# EAGLE board Board_Mod (EAGLE 5.11)
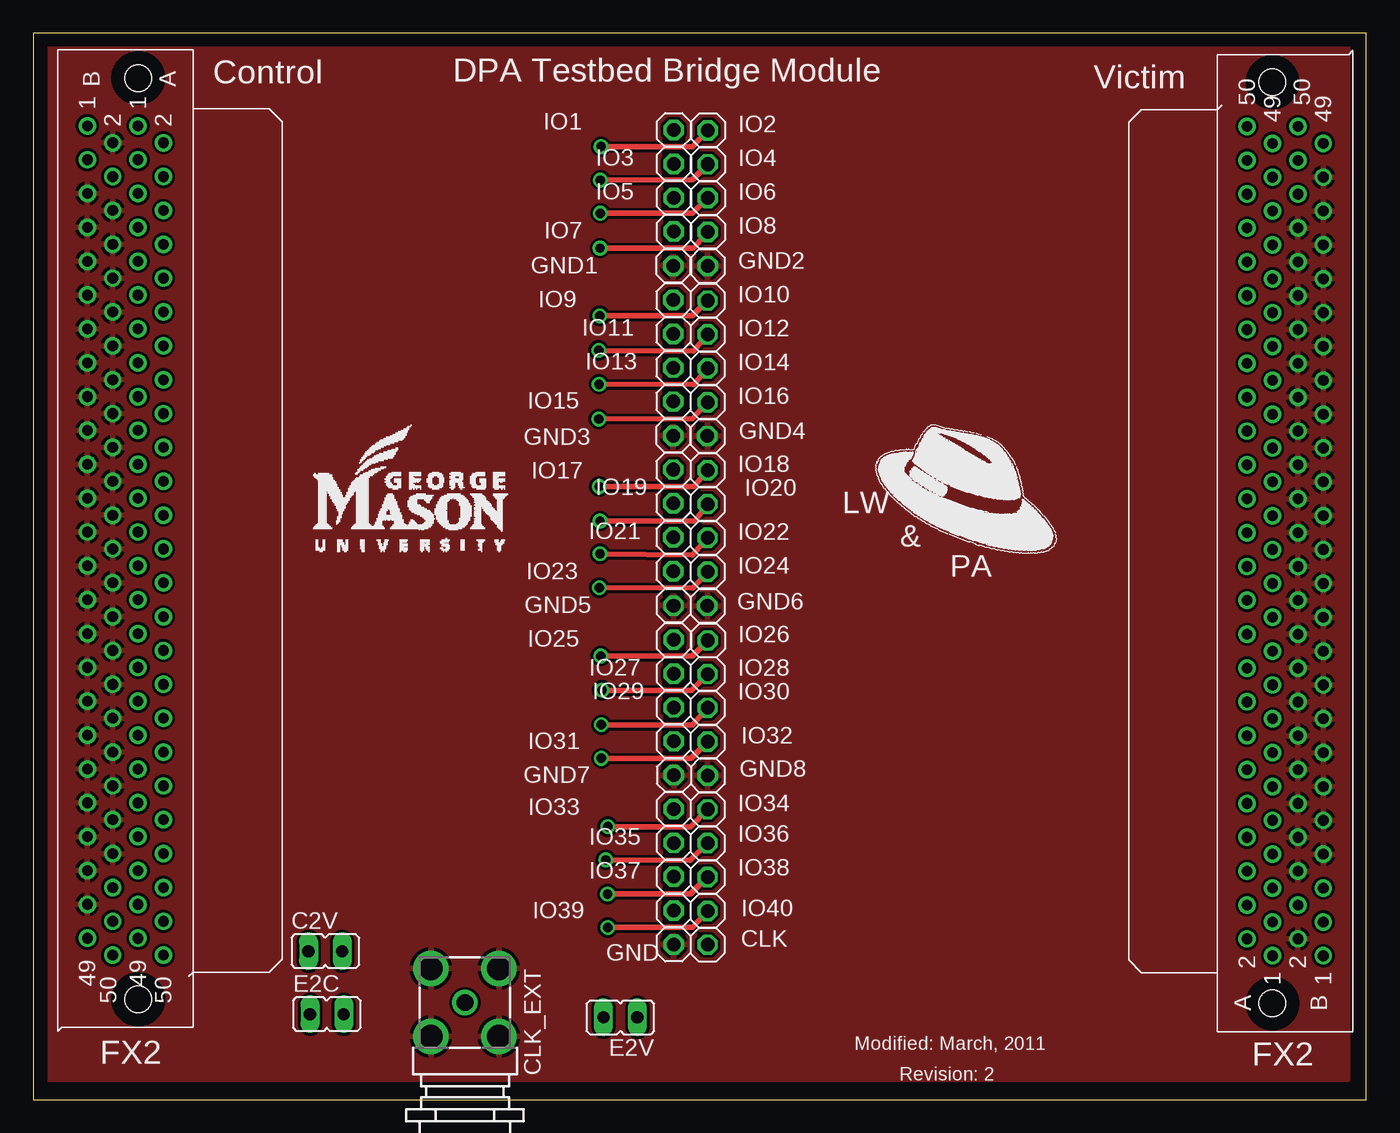
[diagram p0: board, top side]
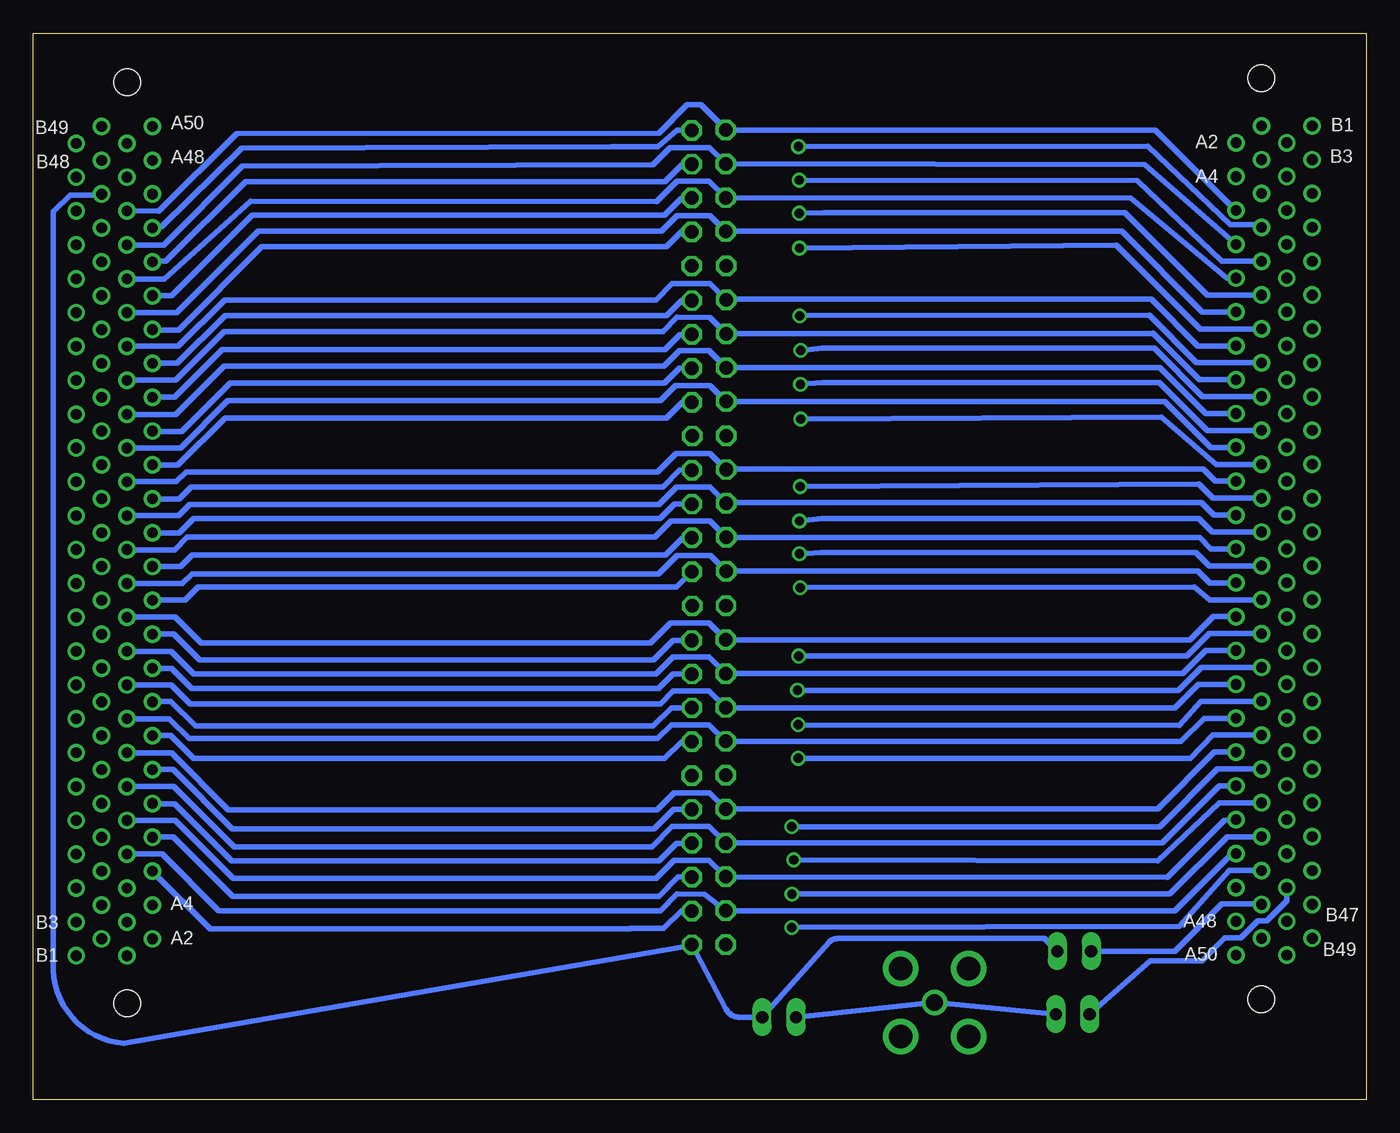
[diagram p1: board, bottom side, seen from below]

Size 100 x 80 mm. Coordinates in mm from the lower left corner, seen from the top.
Outline: 0,0 100,0 100,80 0,80 0,0
Copper layers (1*16): Top 0.035mm / dielectric 1.5mm / Bottom 0.035mm
Design rules "default *": minimum track width 10mil, minimum drill 24mil, track to track 8mil, track to pad 8mil, pad to pad 8mil, via to via 8mil, smd to smd 8mil, copper to edge 40mil, drill to drill 8mil, minimum pad ring 10mil, minimum via ring 8mil, stop-mask expansion 4mil, vias tented up to drill 0mil, thermal gap 10mil

## Footprints (pad centres in the part's own frame; a part is rotated, then mirrored left to right if it is on the bottom)
JP1 = drill 0.914 long: 1 0,-1.27; 2 0,1.27
1X01 = drill 1.016 octagon: 1 0,0
BU-SMA-G = drill 1.27 round: 1 0,0 | drill 1.778 round: 2 -2.55,2.55; 3 2.55,2.55; 4 2.55,-2.55; 5 -2.55,-2.55
HIROSE-FX2-100 = drill 0.8 round: A1 -44.45,6.985; A2 -43.18,8.89; A3 -41.91,6.985; A4 -40.64,8.89; A5 -39.37,6.985; A6 -38.1,8.89; A7 -36.83,6.985; A8 -35.56,8.89; A9 -34.29,6.985; A10 -33.02,8.89; A11 -31.75,6.985; A12 -30.48,8.89; A13 -29.21,6.985; A14 -27.94,8.89; A15 -26.67,6.985; A16 -25.4,8.89; A17 -24.13,6.985; A18 -22.86,8.89; A19 -21.59,6.985; A20 -20.32,8.89; A21 -19.05,6.985; A22 -17.78,8.89; A23 -16.51,6.985; A24 -15.24,8.89; A25 -13.97,6.985; A26 -12.7,8.89; A27 -11.43,6.985; A28 -10.16,8.89; A29 -8.89,6.985; A30 -7.62,8.89; A31 -6.35,6.985; A32 -5.08,8.89; A33 -3.81,6.985; A34 -2.54,8.89; A35 -1.27,6.985; A36 0,8.89; A37 1.27,6.985; A38 2.54,8.89; A39 3.81,6.985; A40 5.08,8.89; A41 6.35,6.985; A42 7.62,8.89; A43 8.89,6.985; A44 10.16,8.89; A45 11.43,6.985; A46 12.7,8.89; A47 13.97,6.985; A48 15.24,8.89; A49 16.51,6.985; A50 17.78,8.89; B1 -44.45,3.175; B2 -43.18,5.08; B3 -41.91,3.175; B4 -40.64,5.08; B5 -39.37,3.175; B6 -38.1,5.08; B7 -36.83,3.175; B8 -35.56,5.08; B9 -34.29,3.175; B10 -33.02,5.08; B11 -31.75,3.175; B12 -30.48,5.08; B13 -29.21,3.175; B14 -27.94,5.08; B15 -26.67,3.175; B16 -25.4,5.08; B17 -24.13,3.175; B18 -22.86,5.08; B19 -21.59,3.175; B20 -20.32,5.08; B21 -19.05,3.175; B22 -17.78,5.08; B23 -16.51,3.175; B24 -15.24,5.08; B25 -13.97,3.175; B26 -12.7,5.08; B27 -11.43,3.175; B28 -10.16,5.08; B29 -8.89,3.175; B30 -7.62,5.08; B31 -6.35,3.175; B32 -5.08,5.08; B33 -3.81,3.175; B34 -2.54,5.08; B35 -1.27,3.175; B36 0,5.08; B37 1.27,3.175; B38 2.54,5.08; B39 3.81,3.175; B40 5.08,5.08; B41 6.35,3.175; B42 7.62,5.08; B43 8.89,3.175; B44 10.16,5.08; B45 11.43,3.175; B46 12.7,5.08; B47 13.97,3.175; B48 15.24,5.08; B49 16.51,3.175; B50 17.78,5.08 | hole 2: 21.09,6.984; -48.032,6.985

## Placement (x,y rotation side)
C2V  [JP1]  21.91,11.13 270 top
CLK  0.035  [1X01]  50.58,11.61 0 top
CLK_EXT  BU-SMA-G  [BU-SMA-G]  32.38,7.28 270 top
E2C  E2C  [JP1]  22.02,6.4 270 top
E2V  [JP1]  44.04,6.17 90 top
GND  0.035  [1X01]  48.04,11.64 0 top
GND1  [1X01]  48.01,62.56 0 top
GND2  [1X01]  50.6,62.53 0 top
GND3  [1X01]  48.01,49.81 0 top
GND4  [1X01]  50.57,49.78 0 top
GND5  [1X01]  48.03,37.06 0 top
GND6  [1X01]  50.57,37.03 0 top
GND7  [1X01]  48.06,24.33 0 top
GND8  [1X01]  50.6,24.31 0 top
IO1  [1X01]  48.04,72.75 0 top
IO2  0.035  [1X01]  50.61,72.72 0 top
IO3  0.035  [1X01]  48.04,70.21 0 top
IO4  0.035  [1X01]  50.61,70.18 0 top
IO5  0.035  [1X01]  48.04,67.67 0 top
IO6  0.035  [1X01]  50.61,67.64 0 top
IO7  0.035  [1X01]  48.04,65.13 0 top
IO8  0.035  [1X01]  50.61,65.1 0 top
IO9  0.035  [1X01]  48.02,59.99 0 top
IO10  0.035  [1X01]  50.58,59.94 0 top
IO11  0.035  [1X01]  48.02,57.45 0 top
IO12  0.035  [1X01]  50.58,57.4 0 top
IO13  0.035  [1X01]  48.02,54.91 0 top
IO14  0.035  [1X01]  50.58,54.86 0 top
IO15  0.035  [1X01]  48.02,52.37 0 top
IO16  0.035  [1X01]  50.58,52.32 0 top
IO17  0.035  [1X01]  48.02,47.27 0 top
IO18  0.035  [1X01]  50.58,47.22 0 top
IO19  0.035  [1X01]  48.02,44.73 0 top
IO20  0.035  [1X01]  50.58,44.68 0 top
IO21  0.035  [1X01]  48.02,42.19 0 top
IO22  0.035  [1X01]  50.58,42.14 0 top
IO23  0.035  [1X01]  48.02,39.65 0 top
IO24  0.035  [1X01]  50.58,39.6 0 top
IO25  0.035  [1X01]  48.04,34.49 0 top
IO26  0.035  [1X01]  50.61,34.44 0 top
IO27  0.035  [1X01]  48.04,31.95 0 top
IO28  0.035  [1X01]  50.58,31.93 0 top
IO29  0.035  [1X01]  48.04,29.41 0 top
IO30  0.035  [1X01]  50.58,29.39 0 top
IO31  0.035  [1X01]  48.04,26.87 0 top
IO32  0.035  [1X01]  50.58,26.85 0 top
IO33  0.035  [1X01]  48.04,21.79 0 top
IO34  0.035  [1X01]  50.58,21.77 0 top
IO35  0.035  [1X01]  48.04,19.25 0 top
IO36  0.035  [1X01]  50.58,19.23 0 top
IO37  0.035  [1X01]  48.04,16.71 0 top
IO38  0.035  [1X01]  50.58,16.69 0 top
IO39  0.035  [1X01]  48.04,14.17 0 top
IO40  0.035  [1X01]  50.58,14.15 0 top
NEXYS2  HIROSE-FX2-100S-1.27DS  [HIROSE-FX2-100]  0.88,28.61 270 top
SPARTAN  HIROSE-FX2-100S-1.27DS  [HIROSE-FX2-100]  99.95,55.23 90 top

## Library data of the parts
C2V E2C E2V = jumper
CLK GND GND1-GND8 IO1-IO40 = pinhead
CLK_EXT = con-coax; OC_FARNELL: unknown; OC_NEWARK: unknown
NEXYS2 SPARTAN = hirose-fx2-100

## Nets
CLK: C2V.2 CLK.1 E2V.1 SPARTAN.B46
GND: CLK_EXT.2 CLK_EXT.3 CLK_EXT.4 CLK_EXT.5 GND1.1 GND2.1 GND3.1 GND4.1 GND5.1 GND6.1 GND7.1 GND8.1 GND.1 NEXYS2.B2 NEXYS2.B5 NEXYS2.B6 NEXYS2.B7 NEXYS2.B8 NEXYS2.B9 NEXYS2.B10 NEXYS2.B11 NEXYS2.B12 NEXYS2.B13 NEXYS2.B14 NEXYS2.B15 NEXYS2.B16 NEXYS2.B17 NEXYS2.B18 NEXYS2.B19 NEXYS2.B20 NEXYS2.B21 NEXYS2.B22 NEXYS2.B23 NEXYS2.B24 NEXYS2.B25 NEXYS2.B26 NEXYS2.B27 NEXYS2.B28 NEXYS2.B29 NEXYS2.B30 NEXYS2.B31 NEXYS2.B32 NEXYS2.B33 NEXYS2.B34 NEXYS2.B35 NEXYS2.B36 NEXYS2.B37 NEXYS2.B38 NEXYS2.B39 NEXYS2.B40 NEXYS2.B41 NEXYS2.B42 NEXYS2.B43 NEXYS2.B44 NEXYS2.B45 NEXYS2.B47 SPARTAN.B2 SPARTAN.B6 SPARTAN.B7 SPARTAN.B8 SPARTAN.B9 SPARTAN.B10 SPARTAN.B11 SPARTAN.B12 SPARTAN.B13 SPARTAN.B14 SPARTAN.B15 SPARTAN.B16 SPARTAN.B17 SPARTAN.B18 SPARTAN.B19 SPARTAN.B20 SPARTAN.B21 SPARTAN.B22 SPARTAN.B23 SPARTAN.B24 SPARTAN.B25 SPARTAN.B26 SPARTAN.B27 SPARTAN.B28 SPARTAN.B29 SPARTAN.B30 SPARTAN.B31 SPARTAN.B32 SPARTAN.B33 SPARTAN.B34 SPARTAN.B35 SPARTAN.B36 SPARTAN.B37 SPARTAN.B38 SPARTAN.B39 SPARTAN.B40 SPARTAN.B41 SPARTAN.B42 SPARTAN.B43 SPARTAN.B44 SPARTAN.B45 SPARTAN.B47
IO1: IO1.1 NEXYS2.A6 SPARTAN.A45
IO2: IO2.1 NEXYS2.A7 SPARTAN.A44
IO3: IO3.1 NEXYS2.A8 SPARTAN.A43
IO4: IO4.1 NEXYS2.A9 SPARTAN.A42
IO5: IO5.1 NEXYS2.A10 SPARTAN.A41
IO6: IO6.1 NEXYS2.A11 SPARTAN.A40
IO7: IO7.1 NEXYS2.A12 SPARTAN.A39
IO8: IO8.1 NEXYS2.A13 SPARTAN.A38
IO9: IO9.1 NEXYS2.A14 SPARTAN.A37
IO10: IO10.1 NEXYS2.A15 SPARTAN.A36
IO11: IO11.1 NEXYS2.A16 SPARTAN.A35
IO12: IO12.1 NEXYS2.A17 SPARTAN.A34
IO13: IO13.1 NEXYS2.A18 SPARTAN.A33
IO14: IO14.1 NEXYS2.A19 SPARTAN.A32
IO15: IO15.1 NEXYS2.A20 SPARTAN.A31
IO16: IO16.1 NEXYS2.A21 SPARTAN.A30
IO17: IO17.1 NEXYS2.A22 SPARTAN.A29
IO18: IO18.1 NEXYS2.A23 SPARTAN.A28
IO19: IO19.1 NEXYS2.A24 SPARTAN.A27
IO20: IO20.1 NEXYS2.A25 SPARTAN.A26
IO21: IO21.1 NEXYS2.A26 SPARTAN.A25
IO22: IO22.1 NEXYS2.A27 SPARTAN.A24
IO23: IO23.1 NEXYS2.A28 SPARTAN.A23
IO24: IO24.1 NEXYS2.A29 SPARTAN.A22
IO25: IO25.1 NEXYS2.A30 SPARTAN.A21
IO26: IO26.1 NEXYS2.A31 SPARTAN.A20
IO27: IO27.1 NEXYS2.A32 SPARTAN.A19
IO28: IO28.1 NEXYS2.A33 SPARTAN.A18
IO29: IO29.1 NEXYS2.A34 SPARTAN.A17
IO30: IO30.1 NEXYS2.A35 SPARTAN.A16
IO31: IO31.1 NEXYS2.A36 SPARTAN.A15
IO32: IO32.1 NEXYS2.A37 SPARTAN.A14
IO33: IO33.1 NEXYS2.A38 SPARTAN.A13
IO34: IO34.1 NEXYS2.A39 SPARTAN.A12
IO35: IO35.1 NEXYS2.A40 SPARTAN.A11
IO36: IO36.1 NEXYS2.A41 SPARTAN.A10
IO37: IO37.1 NEXYS2.A42 SPARTAN.A9
IO38: IO38.1 NEXYS2.A43 SPARTAN.A8
IO39: IO39.1 NEXYS2.A44 SPARTAN.A7
IO40: IO40.1 NEXYS2.A45 SPARTAN.A6
N$1: C2V.1 NEXYS2.A47
N$2: CLK_EXT.1 E2C.2 E2V.2
N$3: E2C.1 NEXYS2.B46

## Tracks (layer width: path | path; a pad name or v marks a point on that pad's centre or on a via)
CLK
  Bottom 0.406: SPARTAN.B46 94.94,67.88 97.25,67.88 98.5,66.62 98.5,10.28 arc-89 93.21,4.23 50.58,11.58 CLK.1 48.02,6.77 arc-62 47.02,6.17 E2V.1 40.28,11.82 arc48 39.69,12.08 24.13,12.08 C2V.2
GND
  pour Top: 0.94,79.35 0.94,1.52 98.63,1.52 98.63,78.97
IO1
  Bottom 0.406: NEXYS2.A6 15.8,72.75 IO1.1 49.91,74.62 50.95,74.62 53.06,72.52 84.76,72.47 90.58,66.65 92.94,66.7 SPARTAN.A45
IO2  (via drill 0.7)
  Top 0.406: v42.6,71.5 49.47,71.48 IO2.1
  Bottom 0.406: NEXYS2.A7 8.05,65.63 10.19,65.63 16.38,71.53 v42.6,71.5 | IO2.1 51.4,72.72 51.69,72.72 53.13,71.48 56.59,71.48 84.38,71.4 90.37,65.48 91.03,65.43 SPARTAN.A44
IO3
  Bottom 0.406: NEXYS2.A8 16.61,70.16 IO3.1 49.26,71.42 52.22,71.42 53.52,70.13 84.33,70.03 90.23,64.12 SPARTAN.A43
IO4  (via drill 0.7)
  Top 0.406: v42.55,68.99 49.44,69.01 IO4.1
  Bottom 0.406: NEXYS2.A9 10.83,62.9 17.17,68.96 v42.55,68.99 | SPARTAN.A42 91.03,62.89 90.07,62.89 84.07,68.89 52.6,68.89 51.31,70.18 IO4.1
IO5
  Bottom 0.406: NEXYS2.A10 10.45,61.63 17.65,67.64 IO5.1 49.29,68.91 51.69,68.91 53.24,67.36 83.69,67.41 90.17,61.57 92.95,61.57 SPARTAN.A41
IO6  (via drill 0.7)
  Top 0.406: v42.55,66.5 49.47,66.5 IO6.1
  Bottom 0.406: NEXYS2.A11 11.92,60.36 18.11,66.55 40.64,66.55 v42.55,66.5 | IO6.1 51.38,67.64 52.65,66.37 83.57,66.37 89.61,60.33 91.06,60.33 SPARTAN.A40
IO7
  Bottom 0.406: NEXYS2.A12 12.28,59.09 18.34,65.15 48.02,65.15 IO7.1 49.24,66.32 51.69,66.32 52.86,65.15 83.13,65.15 89.23,59.05 SPARTAN.A39
IO8  (via drill 0.7)
  Top 0.406: v42.52,63.88 49.52,63.88 IO8.1
  Bottom 0.406: NEXYS2.A13 12.46,57.82 18.75,64.11 v42.52,63.88 | IO8.1 51.38,65.1 52.5,63.98 82.86,63.98 89.1,57.73 91.02,57.73 SPARTAN.A38
IO9
  Bottom 0.406: NEXYS2.A14 12.63,56.55 16.13,60.05 47.97,60.05 IO9.1 49.24,61.21 52.07,61.21 53.29,59.99 85.65,59.99 89.13,56.52 SPARTAN.A37
IO10  (via drill 0.7)
  Top 0.406: v42.49,58.8 49.47,58.83 IO10.1
  Bottom 0.406: NEXYS2.A15 12.73,55.28 16.26,58.85 v42.49,58.8 | IO10.1 51.38,59.94 52.5,58.83 85.62,58.83 89.2,55.24 91.06,55.24 SPARTAN.A36
IO11
  Bottom 0.406: NEXYS2.A16 12.51,54.01 16,57.51 16,57.48 47.99,57.48 IO11.1 49.24,58.67 51.69,58.7 52.76,57.63 85.7,57.61 89.33,53.98 92.96,53.98 SPARTAN.A35
IO12  (via drill 0.7)
  Top 0.406: v42.42,56.21 49.52,56.16 IO12.1
  Bottom 0.406: NEXYS2.A17 12.28,52.74 15.9,56.36 40.84,56.36 v42.42,56.21 | IO12.1 51.49,57.4 52.6,56.29 85.83,56.29 89.41,52.7 SPARTAN.A34
IO13
  Bottom 0.406: NEXYS2.A18 12.05,51.47 15.49,54.91 IO13.1 49.29,56.19 51.54,56.19 52.68,55.04 85.7,55.04 89.33,51.41 92.95,51.41 SPARTAN.A33
IO14  (via drill 0.7)
  Top 0.406: v42.44,53.67 49.57,53.65 IO14.1
  Bottom 0.406: NEXYS2.A19 11.92,50.2 15.52,53.8 40.74,53.8 v42.44,53.67 | IO14.1 51.51,54.86 52.63,53.75 85.24,53.75 88.88,50.11 91.02,50.11 SPARTAN.A32
IO15
  Bottom 0.406: NEXYS2.A20 11.67,48.93 15.11,52.38 IO15.1 49.21,53.57 51.82,53.57 52.96,52.43 85.42,52.43 88.95,48.9 92.96,48.9 SPARTAN.A31
IO16  (via drill 0.7)
  Top 0.406: v42.42,51.05 49.47,51.08 IO16.1
  Bottom 0.406: NEXYS2.A21 11.26,47.66 15.37,51.21 v42.42,51.05 | IO16.1 51.31,52.32 52.5,51.13 85.62,51.13 89.15,47.6 91.05,47.6 SPARTAN.A30
IO17
  Bottom 0.406: NEXYS2.A22 11.31,46.39 12.22,47.3 47.99,47.3 IO17.1 49.21,48.46 51.79,48.46 53.16,47.09 88.54,47.09 89.28,46.35 92.96,46.35 SPARTAN.A29
IO18  (via drill 0.7)
  Top 0.406: v42.47,46 49.57,46 IO18.1
  Bottom 0.406: NEXYS2.A23 11.52,45.12 12.57,46.18 v42.47,46 | IO18.1 51.51,47.22 52.76,45.97 56.72,45.97 56.74,45.95 88.16,45.95 89.05,45.06 91.05,45.06 SPARTAN.A28
IO19
  Bottom 0.406: NEXYS2.A24 11.44,43.85 12.37,44.78 47.97,44.78 IO19.1 49.24,45.95 51.74,45.95 53.06,44.63 88.27,44.63 89.08,43.81 92.96,43.81 SPARTAN.A27
IO20  (via drill 0.7)
  Top 0.406: v42.52,43.41 49.64,43.41 IO20.1
  Bottom 0.406: NEXYS2.A25 11.54,42.58 12.55,43.59 40.84,43.59 v42.52,43.41 | IO20.1 51.89,44.68 52.98,43.59 87.99,43.59 89.05,42.52 SPARTAN.A26
IO21
  Bottom 0.406: NEXYS2.A26 11.64,41.31 12.5,42.16 47.99,42.16 IO21.1 49.24,43.41 52.15,43.41 53.37,42.19 88.47,42.19 89.41,41.25 92.95,41.25 SPARTAN.A25
IO22  (via drill 0.7)
  Top 0.406: v42.52,40.95 49.44,40.87 IO22.1
  Bottom 0.406: NEXYS2.A27 11.77,40.04 12.78,41.05 40.87,41.05 v42.52,40.95 | IO22.1 51.31,42.14 52.58,40.87 88.09,40.87 88.95,40.01 91.06,40.01 SPARTAN.A24
IO23
  Bottom 0.406: NEXYS2.A28 11.74,38.77 12.62,39.65 IO23.1 49.19,40.82 51.71,40.82 53.09,39.45 88.09,39.45 88.82,38.71 92.95,38.71 SPARTAN.A23
IO24  (via drill 0.7)
  Top 0.406: v42.47,38.41 49.49,38.38 IO24.1
  Bottom 0.406: NEXYS2.A29 11.72,37.5 12.9,38.46 v42.47,38.41 | IO24.1 51.73,38.46 87.63,38.46 88.62,37.47 91.06,37.47 SPARTAN.A22
IO25
  Bottom 0.406: NEXYS2.A30 11.47,36.23 13.23,34.47 48.02,34.47 IO25.1 49.29,35.74 52.2,35.74 53.7,34.24 87.4,34.24 89.36,36.2 SPARTAN.A21
IO26  (via drill 0.7)
  Top 0.406: v42.57,33.27 49.44,33.27 IO26.1
  Bottom 0.406: NEXYS2.A31 11.78,34.96 13.46,33.27 v42.57,33.27 | IO26.1 51.99,34.44 53.47,32.97 87.53,32.97 89.48,34.92 91.06,34.92 SPARTAN.A20
IO27
  Bottom 0.406: NEXYS2.A32 12.03,33.69 13.77,31.95 IO27.1 49.29,33.2 51.99,33.2 53.26,31.93 87.96,31.93 89.66,33.63 92.95,33.63 SPARTAN.A19
IO28  (via drill 0.7)
  Top 0.406: v42.67,30.71 49.37,30.71 IO28.1
  Bottom 0.406: NEXYS2.A33 12.39,32.42 14.1,30.71 v42.67,30.71 | IO28.1 52.02,31.93 53.11,30.84 88.11,30.84 89.61,32.33 91.02,32.33 SPARTAN.A18
IO29
  Bottom 0.406: NEXYS2.A34 12.59,31.15 14.35,29.39 48.02,29.39 IO29.1 49.29,30.66 51.99,30.66 52.96,29.69 88.24,29.69 89.66,31.11 SPARTAN.A17
IO30  (via drill 0.7)
  Top 0.406: v42.62,28.12 49.44,28.12 IO30.1
  Bottom 0.406: NEXYS2.A35 12.41,29.88 14.02,28.07 v42.62,28.12 | IO30.1 52.12,29.39 53.49,28.02 87.83,28.02 89.69,29.87 91.03,29.87 SPARTAN.A16
IO31
  Bottom 0.406: NEXYS2.A36 12.16,28.61 13.89,26.87 IO31.1 49.29,28.12 52.12,28.12 53.16,27.08 88.32,27.08 89.81,28.57 92.96,28.57 SPARTAN.A15
IO32  (via drill 0.7)
  Top 0.406: v42.62,25.6 49.34,25.6 IO32.1
  Bottom 0.406: NEXYS2.A37 11.52,27.34 13.18,25.6 v42.62,25.6 | IO32.1 51.38,26.85 52.65,25.58 87.96,25.58 89.69,27.3 91.06,27.3 SPARTAN.A14
IO33
  Bottom 0.406: NEXYS2.A38 11.39,26.07 15.65,21.82 48.02,21.82 IO33.1 49.26,23.01 51.94,23.01 53.21,21.74 85.37,21.74 89.64,26.01 92.95,26.01 SPARTAN.A13
IO34  (via drill 0.7)
  Top 0.406: v43.1,20.47 49.29,20.47 IO34.1
  Bottom 0.406: NEXYS2.A39 11.17,24.8 15.49,20.47 v43.1,20.47 | IO34.1 51.97,21.77 53.42,20.32 85.06,20.32 89.51,24.77 91.06,24.77 SPARTAN.A12
IO35
  Bottom 0.406: NEXYS2.A40 11.01,23.53 15.29,19.25 IO35.1 49.29,20.5 52.07,20.5 53.59,18.97 84.94,18.97 89.46,23.5 92.96,23.5 SPARTAN.A11
IO36  (via drill 0.7)
  Top 0.406: v42.95,17.98 49.26,17.96 IO36.1
  Bottom 0.406: NEXYS2.A41 11.01,22.26 15.62,17.91 v42.95,17.98 | IO36.1 51.74,19.23 53.06,17.91 85.11,17.91 89.38,22.17 91.02,22.17 SPARTAN.A10
IO37
  Bottom 0.406: NEXYS2.A42 10.66,20.94 14.94,16.66 IO37.1 49.29,17.96 51.92,17.96 53.26,16.61 85.01,16.61 89.36,20.95 SPARTAN.A9
IO38  (via drill 0.7)
  Top 0.406: v43.08,15.42 49.31,15.42 IO38.1
  Bottom 0.406: NEXYS2.A43 10.43,19.72 14.73,15.42 v43.08,15.42 | IO38.1 51.61,16.69 53.06,15.24 85.04,15.24 89.51,19.71 91.03,19.71 SPARTAN.A8
IO39
  Bottom 0.406: NEXYS2.A44 10.07,18.45 14.35,14.17 IO39.1 49.64,15.39 51.71,15.42 52.96,14.15 86.08,14.15 90.35,18.41 SPARTAN.A7
IO40  (via drill 0.7)
  Top 0.406: v43.1,12.9 49.44,12.93 IO40.1
  Bottom 0.406: NEXYS2.A45 10.28,17.18 14.02,13.01 v43.1,12.9 | IO40.1 51.38,14.15 52.7,12.83 55.22,12.83 55.24,12.8 86.73,12.8 SPARTAN.A6
N$1
  Bottom 0.406: NEXYS2.A47 7.89,14.67 10.82,14.67 14.36,11.12 C2V.1
N$2
  Bottom 0.406: E2V.2 CLK_EXT.1 E2C.2
N$3
  Bottom 0.406: E2C.1 16.18,10.4 12.31,10.4 10.59,12.12 9.41,12.12 8.12,13.41 7.47,13.41 5.96,14.92 NEXYS2.B46

## Text on the board
tPlace: Control | DPA Testbed Bridge Module | Victim | LW | & | PA | Modified: March, 2011 | FX2 | FX2 | Revision: 2
bPlace: B1 | A50 | B49 | A2 | B3 | A48 | B48 | A4 | A4 | B47 | A48 | B3 | A2 | B49 | A50 | B1